# Altium PCB Wenzel_REF.PCBDOC (part 6 of 7)
Units mm, origin at the board's own origin, x right, y up, seen from the top; angles counter-clockwise.
Board outline 222.63 x 100.1 mm, 4 copper layers (Top, L2, L3, Bot), stack 1.6 mm thick; 406 components, 236 nets, 1324 pads, 1362 vias.
Unrouted connection lines stored in the file: 1.
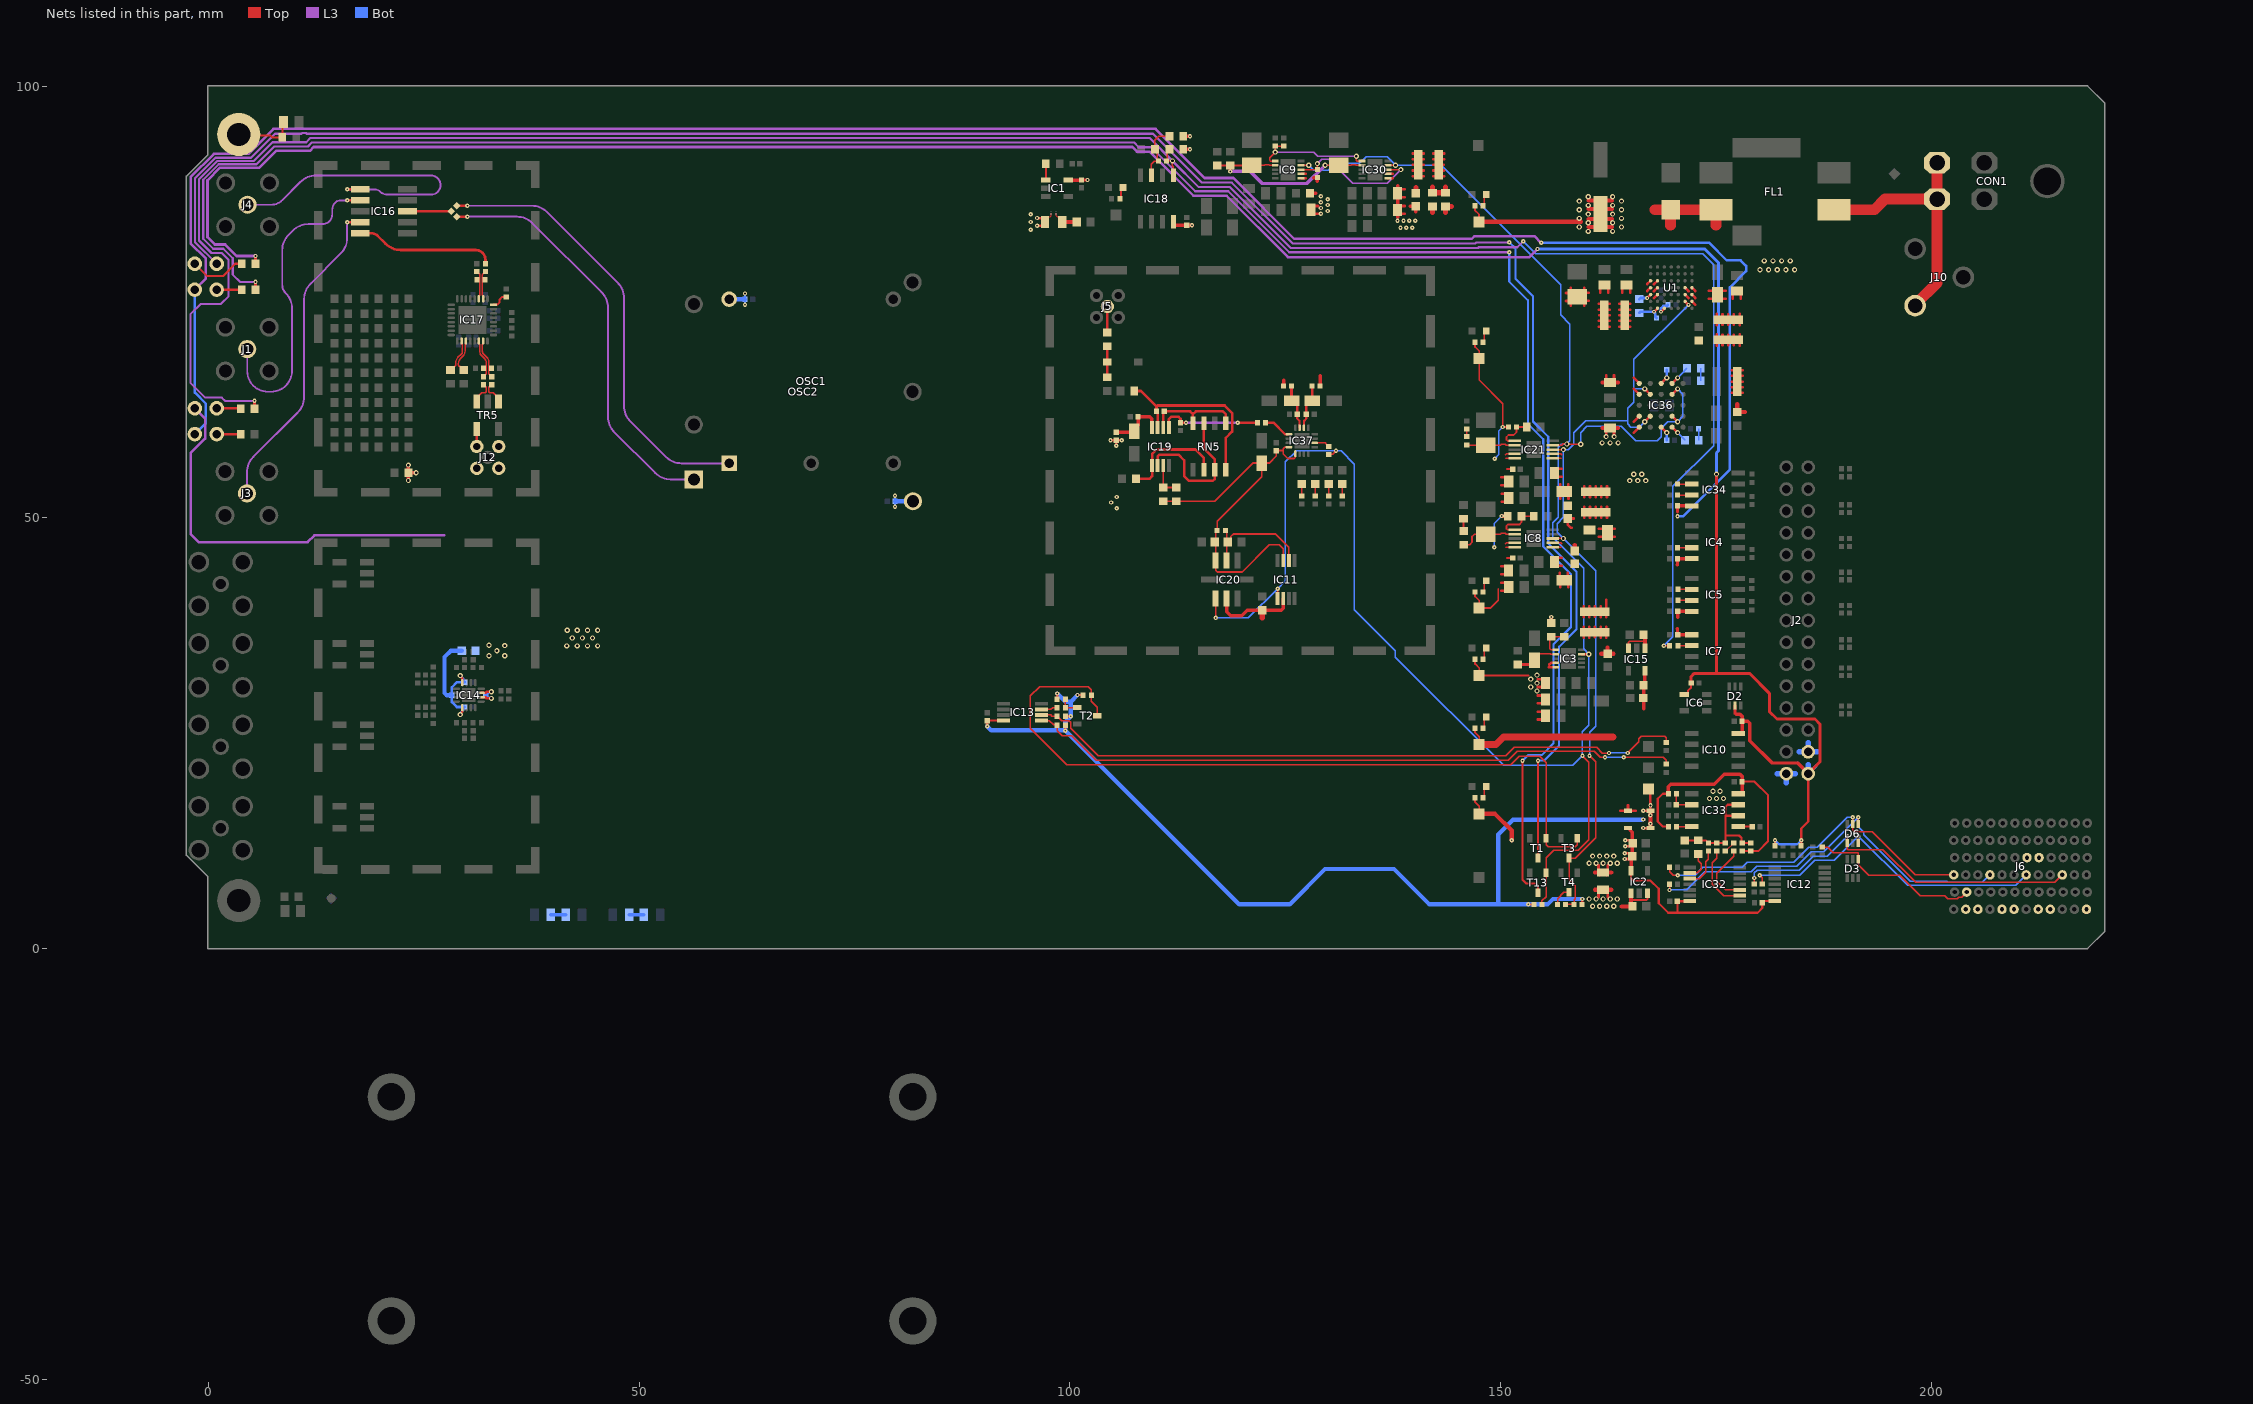
[diagram p6: the nets of this part, all layers, seen from the top]

## Via types
v1: diameter 0.5, hole 0.2, Top to Bot, tented both sides, 654 vias
v2: diameter 0.6, hole 0.3, Top to Bot, 478 vias
v3: diameter 0.5, hole 0.2, Top to Bot, 196 vias
v4: diameter 0.45, hole 0.2, Top to Bot, 34 vias

## Nets (pads, with @x,y where several pads share a name; then routed paths per layer and width w, separated by ;. In a path a pad name is that pad's centre, name@x,y a point inside that pad or via, vN(x,y) a via of type N, cw(c..) or ccw(c..) an arc to the next point about the centre after c; other vN are vias at no path point) (continued)
NetC26_1: C26.1 C27.2 IC8.1 IC8.2 L8.2 | length 6.3
  Top w0.2: IC8.1@156.001,46.527 157.001,46.527 ; IC8.2@156.001,47.027 156.961,47.027 157.071,46.917
  Top w0.3: C27.2@156.133,44.355 157.032,44.355 ; C27.2@156.133,45.275 157.032,45.275 ; C26.1@156.844,43.194 156.844,43.559 ; 156.886,41.875 C26.1@156.886,42.71 ; C26.1@157.775,42.728 157.775,43.563 ; 157.817,41.879 C26.1@157.817,42.244
NetC32_1: C32.1 IC8.7 R40.1 | length 6.9
  Top w0.2: R40.1@145.666,46.807 146.368,46.807 146.649,47.089 146.649,47.748 146.928,48.027 C32.1@148.25,48.027 149.953,48.027 150.052,48.126 150.52,48.126 150.62,48.027 IC8.7@151.601,48.027
NetC35_2: C35.2 R170.1 | length 1.4
  Top w0.15: R170.1@126.897,52.451 C35.2@126.897,53.846
NetC39_2: C39.2 C43.2 C45.2 IC14.8 IC14.13 L9.2 | length 16.4
  Top w0.3: v2@29.254,26.985 v2@29.254,27.066 ; v2@29.254,27.172 29.486,27.403 IC14.13@29.486,27.906 ; v2(29.254,31.621) 29.254,31.54 29.486,31.309 IC14.8@29.486,30.806
  Bot w0.3: v2@29.22,27.206 29.591,27.578 29.591,27.811 C43.2@29.751,27.971 28.855,27.971 28.273,28.553 C39.2@28.273,29.356 28.273,30.268 28.861,30.856 C45.2@29.786,30.856 29.626,31.016 29.626,31.25 v2(29.254,31.621)
  Bot w0.5: C39.2@28.273,29.356 27.676,29.356 27.435,29.597 27.435,33.775 28.165,34.505 L9.2@29.436,34.505
  other v2: 29.254,27.091
NetC40_2: C40.2 C48.2 NT2.2 OSC1.5 OSC2.2 R71.2 | length 9.6
  Top w0.127: R71.2@97.1,84.256 97.1,84.435 97.512,84.847 97.691,84.847 97.8,84.956 NT2.2@97.8,85.206
  Top w0.3: v3@96.187,83.811 R71.2@97.067,83.811 ; v3@96.187,84.7 R71.2@97.067,84.7
  Bot w0.254: v1(62.301,74.649) C40.2@62.3,75.3 v1@62.3,75.951 ; v1(79.701,51.199) C48.2@79.7,51.85 v1(79.699,52.501)
  Bot w0.5: OSC1.5@60.45,75.3 C40.2@62.3,75.3 ; C48.2@79.7,51.85 OSC2.2@81.775,51.85
  other v1: 62.299,75.951
  other v3: 95.458,83.364 96.184,83.808 95.455,84.256 96.184,84.703 95.455,85.15
NetC41_1: C41.1 OSC2.1 | length 48.3
  Top w0.3: C41.1@28.849,84.864 v1(30.083,84.864)
  L3 w0.226: v1(30.083,84.864) 35.834,84.864 cw(c35.834,82.324) 37.63,84.12 45.656,76.094 cw(c43.86,74.298) 46.4,74.298 46.4,61.652 ccw(c48.94,61.652) 47.144,59.856 51.866,55.134 ccw(c53.662,56.93) 53.662,54.39 OSC2.1@56.35,54.39
NetC41_2: C41.2 C46.2 IC16.3 | length 5.1
  Top w0.3: IC16.3@23.13,85.5 C46.2@28.212,85.5
NetC42_2: C42.2 IC14.2 IC14.3 | length 4.1
  Top w0.3: IC14.2@31.686,29.106 32.188,29.106 32.318,28.976 v2(32.863,28.976) ; IC14.3@31.686,29.606 32.188,29.606 32.318,29.736 v2(32.863,29.736)
  Bot w0.3: v2(32.863,28.976) 32.806,29.034 32.531,29.034 C42.2@32.209,29.356 32.531,29.678 32.806,29.678 v2(32.863,29.736)
NetC46_1: C46.1 OSC1.1 | length 52.1
  Top w0.3: C46.1@28.849,86.136 v1(30.083,86.136)
  L3 w0.226: v1(30.083,86.136) 37.535,86.136 cw(c37.535,83.596) 39.331,85.392 47.506,77.218 cw(c45.71,75.422) 48.25,75.422 48.25,62.92 ccw(c50.79,62.92) 48.994,61.124 53.124,56.994 ccw(c54.92,58.79) 54.92,56.25 OSC1.1@60.45,56.25
NetC47_1: C47.1 IC16.10 | length 16.3
  Top w0.3: IC16.10@17.67,82.96 18.888,82.96 cw(c18.888,82.923) 18.914,82.949 cw(c18.914,81.865) 19.681,82.632 20.569,81.744 ccw(c22.365,83.54) 22.365,81 31.03,81 cw(c31.03,79.85) 32.18,79.85 C47.1@32.18,79.407
NetC60_1: C60.1 C105.2 L3.2 U1.A4 U1.A5 U1.A6 U1.B4 U1.B5 | length 14.7
  Top w0.3: U1.B5@171.366,75.832 171.766,75.432 ; U1.B4@171.366,76.632 171.766,76.232 ; U1.A6@172.166,75.032 172.566,74.632 ; U1.A5@172.166,75.832 172.566,75.432 ; U1.A4@172.166,76.632 172.566,76.232 ; 174.134,75.34 C60.1@175.106,75.34 ; 174.134,76.265 C60.1@175.111,76.265 ; 175.053,72.293 L3.2@175.053,72.918 ; L3.2@175.053,72.947 175.053,73.571 ; C60.1@175.129,76.265 176.106,76.265 ; C60.1@175.135,75.34 176.106,75.34 ; 175.712,72.307 L3.2@175.712,72.918 ; L3.2@175.712,72.947 175.712,73.558 ; 176.37,72.321 L3.2@176.37,72.932 176.37,73.544 ; 176.907,75.349 176.91,75.352 C105.2@176.91,76.25 ; 177.029,72.307 L3.2@177.029,72.918 ; L3.2@177.029,72.947 177.029,73.558 ; 177.687,72.293 L3.2@177.687,72.918 ; L3.2@177.687,72.947 177.687,73.571 ; C105.2@177.83,76.25 177.83,75.352 177.833,75.349
NetC63_1: C63.1 IC19.6 RN5.1 RN5.4 | length 11.6
  Top w0.3: IC19.6@110.825,60.396 110.825,62.173 C63.1@110.941,62.289 113.922,62.289 114.262,61.949 ; RN5.4@114.262,60.899 114.262,61.949 ; RN5.1@118.072,60.899 118.072,61.949 117.732,62.289 114.602,62.289 114.262,61.949
NetC63_2: C63.2 IC19.7 R2.1 RN5.8 | length 21.9
  Top w0.3: R2.1@107.465,64.641 108.228,64.641 110.041,62.827 ; IC19.7@110.175,60.396 110.175,62.156 C63.2@110.041,62.289 110.041,62.827 ; RN5.8@118.072,55.499 118.072,59.193 118.822,59.943 118.822,62.076 117.942,62.957 110.17,62.957 110.041,62.827
NetC64_2: C64.2 R165.1 | length 1.4
  Top w0.15: R165.1@131.575,52.451 C64.2@131.575,53.846
NetC65_2: C65.2 C77.1 L4.2 L6.1 L8.1 | length 12.6
  Top w0.3: 158.191,48.784 158.097,48.784 157.733,49.148 L6.1@157.733,49.845 158.429,49.845 ; 159.677,49.94 L4.2@159.677,50.564 ; L4.2@159.677,50.593 159.677,51.217 ; 160.335,49.953 L4.2@160.335,50.564 ; L4.2@160.335,50.593 160.335,51.204 ; 160.994,49.967 L4.2@160.994,50.578 160.994,51.19 ; 161.375,47.726 162.347,47.726 C77.1@162.379,47.758 ; 161.375,48.651 162.352,48.651 C77.1@162.379,48.678 ; 161.652,49.953 L4.2@161.652,50.564 ; L4.2@161.652,50.593 161.652,51.204 ; 162.311,49.94 L4.2@162.311,50.564 ; L4.2@162.311,50.593 162.311,51.217 ; C77.1@162.371,48.651 163.192,48.651 ; C77.1@162.376,47.726 163.226,47.726
  Top w0.5: L8.1@158.579,46.081 158.579,46.777
NetC66_2: C66.2 R64.1 | length 1.4
  Top w0.15: R64.1@128.456,52.446 C66.2@128.456,53.846
NetC67_1: C67.1 IC19.5 R136.2 | length 11.9
  Top w0.254: v1(119.462,60.96) R136.2@121.773,60.96
  Top w0.3: IC19.5@111.475,60.396 111.48,60.401 111.48,61.378 111.746,61.644 112.594,61.644 112.818,61.42 C67.1@112.818,60.96 v1(113.47,60.96)
  L3 w0.3: v1(113.47,60.96) v1(119.462,60.96)
NetC68_2: C68.2 R163.1 | length 1.4
  Top w0.15: R163.1@130.015,52.446 C68.2@130.015,53.846
NetC71_2: C71.2 C138.1 C167.2 IC11.7 IC20.7 IC37.4 IC37.5 R159.2 R160.2 R179.2 | length 45.5
  Top w0.2: R159.2@110.842,51.846 R160.2@112.342,51.846 116.78,51.846 121.209,56.274 C138.1@122.252,56.274 ; R179.2@116.987,48.572 116.91,48.495 IC20.7@116.91,44.955 116.91,43.842 117.121,43.632 119.958,43.632 123.141,46.815 124.285,46.815 124.742,46.358 IC11.7@124.742,44.952 ; R179.2@117.084,48.455 117.084,49.534 122.252,54.703 C138.1@122.252,56.274 ; C71.2@123.936,57.724 123.936,57.102 123.109,56.274 C138.1@122.252,56.274 ; C71.2@124.075,57.746 124.094,57.727 124.723,57.727 ; IC37.4@125.396,58.121 125.39,58.114 124.917,58.114 124.745,57.943 124.745,57.332 125.271,56.806 126.02,56.806 126.137,56.924 126.137,57.361 IC37.5@126.146,57.371
NetC72_2: C72.2 L10.1 R8.2 U1.F3 U1.F4 U1.F5 U1.G3 U1.G4 U1.G5 | length 12.3
  Top w0.3: 163.731,72.115 L10.1@164.356,72.115 ; 163.731,74.749 L10.1@164.356,74.749 ; 163.744,72.774 L10.1@164.356,72.774 ; 163.744,74.091 L10.1@164.356,74.091 ; 163.759,73.432 L10.1@164.37,73.432 164.981,73.432 ; 164.097,76.052 C72.2@164.097,76.95 ; L10.1@164.385,72.115 165.009,72.115 ; L10.1@164.385,72.774 164.996,72.774 ; L10.1@164.385,74.091 164.996,74.091 ; L10.1@164.385,74.749 165.009,74.749 ; 165.017,76.052 C72.2@165.017,76.95 ; v4(166.966,75.432) U1.G5@167.366,75.832 ; 166.966,76.232 U1.G4@167.366,76.632 ; 166.966,77.032 U1.G3@167.366,77.432 ; 167.766,75.432 U1.F5@168.166,75.832 ; 167.766,76.232 U1.F4@168.166,76.632 ; 167.766,77.032 U1.F3@168.166,77.432
  Bot w0.3: R8.2@166.066,75.305 166.193,75.432 v4(166.966,75.432)
NetC76_2: C76.2 IC36.A3 | length 1.8
  Top w0.3: IC36.A3@168.597,65.523 v2(169.232,66.158)
  Bot w0.3: v2(169.232,66.158) C76.2@169.232,67.093
NetC79_2: C79.2 IC33.6 IC33.7 R58.1 R138.1 R139.1 R140.1 R141.1 R143.1 | length 15.8
  Top w0.254: C79.2@171.331,12.473 172.856,12.473 172.881,12.498 173.756,12.498 174.061,12.193 R139.1@174.081,12.193 R140.1@175.061,12.193 R141.1@176.042,12.193 176.042,13.073 ; IC33.6@177.532,15.365 176.148,15.365 176.042,15.259 ; IC33.7@177.532,16.635 176.308,16.635 176.042,16.369 176.042,15.259 ; R143.1@178.984,12.193 R58.1@178.003,12.193 177.931,12.265 177.931,12.773 177.631,13.073 176.042,13.073 ; 176.042,13.073 176.042,15.259
NetC81_2: C81.2 IC33.2 R146.2 | length 3.1
  Top w0.152: R146.2@170.376,17.905 170.356,17.885 C81.2@170.356,16.635 IC33.2@172.132,16.635
NetC82_2: C82.2 IC33.5 | length 1.8
  Top w0.254: IC33.5@177.391,14.095 C82.2@179.165,14.095
NetC85_1: C85.1 C92.2 IC21.1 IC21.2 L6.2 | length 6.3
  Top w0.2: IC21.1@156.001,56.847 157.001,56.847 ; IC21.2@156.001,57.347 156.961,57.347 157.071,57.238
  Top w0.3: C92.2@156.133,54.675 157.032,54.675 ; C92.2@156.133,55.595 157.032,55.595 ; C85.1@156.864,53.469 156.864,53.834 ; 156.906,52.15 C85.1@156.906,52.985 ; C85.1@157.795,53.003 157.795,53.838 ; 157.837,52.154 C85.1@157.837,52.519
NetC91_1: C91.1 IC21.7 R117.2 | length 5.7
  Top w0.2: R117.2@146.032,58.393 146.077,58.347 C91.1@148.25,58.347 149.953,58.347 150.052,58.447 150.52,58.447 150.62,58.347 IC21.7@151.601,58.347
NetC93_1: C93.1 C123.1 IC9.7 IC30.7 R51.2 R116.2 | length 24.3
  Top w0.2: R51.2@117.087,90.801 R116.2@118.608,90.801 121.083,90.801 C123.1@121.108,90.827 122.541,90.827 122.619,90.904 123.082,90.904 123.16,90.827 IC9.7@123.81,90.827 ; v2(129.594,90.834) 131.172,90.834 C93.1@131.179,90.827 132.612,90.827 132.69,90.904 133.153,90.904 133.231,90.827 IC30.7@133.881,90.827
  Top w0.4: v1@118.608,90.12 R116.2@118.608,90.801
  L3 w0.4: v1(118.608,90.112) 120.908,90.112 122.3,88.719 127.48,88.719 v2(129.594,90.834)
NetC94_2: C94.2 IC11.6 IC20.6 R179.1 | length 13.5
  Top w0.2: R179.1@117.927,48.572 117.927,48.552 118.18,48.298 IC20.6@118.18,44.955 ; C94.2@118.303,47.115 118.665,47.477 118.665,47.752 118.949,48.036 123.876,48.036 125.392,46.52 IC11.6@125.392,44.952
NetC95_1: C95.1 R129.2 ST1.1 | length 7
  Top w0.254: ST1.1@3.556,94.412 3.668,94.3 7.2,94.3 7.45,94.05 8.589,94.05 R129.2@8.614,94.075 8.614,95.739 C95.1@8.725,95.85
NetC101_1: C101.1 IC3.7 R39.1 | length 5.3
  Top w0.2: C101.1@153.886,33.502 153.886,33.627 154.411,34.152 155.721,34.152 155.775,34.097 IC3.7@156.36,34.097
  Top w0.3: R39.1@151.968,32.905 153.841,32.905 153.886,32.95 C101.1@153.886,33.377 C101.1@153.886,33.502
NetC154_2: C154.2 IC36.E3 | length 1.8
  Top w0.3: IC36.E3@168.597,60.443 v2(169.232,59.808)
  Bot w0.3: C154.2@169.232,58.943 v2(169.232,59.808)
NetD3_4: D3.4 J6.K2 R54.2 | length 20.3
  Top w0.152: R54.2@187.274,11.719 187.894,11.719 188.534,11.08 191.386,11.08 191.475,10.991 D3.4@191.475,10.317 191.475,9.667 192.696,8.445 196.291,8.445 198.648,6.088 201.502,6.088 201.843,5.747 202.951,5.747 203.127,5.924 203.462,5.924 J6.K2@204.039,6.5
NetD4_1: D4.1 R168.2 R169.1 | length 3.6
  Top w0.3: R168.2@104.34,66.241 D4.1@104.34,68 R169.1@104.34,69.841
NetD6_1: D6.1 J6.C3 R57.2 | length 42.2
  Top w0.15: R57.2@179.4,7.44 v1(179.4,8.144) ; D6.1@190.175,12.193 v3(190.176,12.981)
  Top w0.152: D6.1@190.175,12.193 190.175,11.531 190.277,11.43 194.312,11.43 198.115,7.627 214.266,7.627 J6.C3@215.139,8.5
  Bot w0.15: v1(179.4,8.144) 179.4,8.72 179.713,9.033 184.587,9.033 186.239,10.684 187.879,10.684 v3(190.176,12.981)
NetD6_3: D6.3 J6.F3 R52.2 | length 37.6
  Top w0.15: v1(180.02,8.459) 180.335,8.144 R52.2@180.335,7.44 ; D6.3@191.475,12.193 v3(191.476,12.981)
  Bot w0.15: v1(180.02,8.459) 184.653,8.459 186.4,10.205 188.7,10.205 v3(191.476,12.981)
  Bot w0.152: v3(191.476,12.981) 197.182,7.275 209.714,7.275 J6.F3@210.939,8.5
NetD6_4: D6.4 J6.I3 R53.2 | length 46.4
  Top w0.15: v1@169.561,6.76 R53.2@169.561,7.395 ; D6.4@191.475,14.393 v3(191.476,15.181)
  Bot w0.15: v1(169.561,6.747) 171.572,6.747 173.673,8.848 179.043,8.848 179.698,9.503 184.3,9.503 185.985,11.188 187.483,11.188 v3(191.476,15.181)
  Bot w0.152: v3(191.476,15.181) 191.476,14.069 192.122,13.423 192.122,13.127 197.497,7.752 201.714,7.752 201.851,7.615 205.853,7.615 J6.I3@206.739,8.5
NetD6_5: D6.5 J6.L3 R55.2 | length 40.1
  Top w0.15: R55.2@169.571,9.366 169.571,8.867 169.992,8.445 v1(170.511,8.445) ; D6.5@190.825,14.393 v3(190.826,15.181)
  Top w0.152: D6.5@190.825,14.393 190.825,13.715 191.045,13.496 193.081,13.496 198.077,8.5 J6.L3@202.539,8.5
  Bot w0.15: v1(170.511,8.445) 172.523,8.445 173.433,9.355 178.019,9.355 178.605,9.941 184.004,9.941 185.742,11.679 186.676,11.679 190.177,15.181 v3(190.826,15.181)
NetIC1_1: IC1.1 R3.2 | length 1.9
  Top w0.254: IC1.1@97.199,89.115 R3.2@97.199,90.99
NetIC3_6: IC3.6 R32.2 R33.1 | length 3.7
  Top w0.2: IC3.6@156.36,34.597 156.336,34.621 155.809,34.621 155.677,34.753 155.677,35.966 R33.1@155.833,36.123 R32.2@157.341,36.123
NetIC4_7: IC4.7 R13.2 | length 1.6
  Top w0.15: R13.2@170.509,46.458 IC4.7@172.132,46.458
NetIC5_6: IC5.6 R17.2 | length 1.6
  Top w0.15: R17.2@170.509,41.615 IC5.6@172.132,41.615
NetIC5_7: IC5.7 R15.2 | length 1.6
  Top w0.15: R15.2@170.509,40.345 IC5.7@172.132,40.345
NetIC7_2: IC7.2 R18.2 | length 1.7
  Top w0.15: R18.2@170.459,35.096 IC7.2@172.132,35.096
NetIC8_6: IC8.6 R42.2 R43.1 | length 5.4
  Top w0.2: IC8.6@151.601,48.527 150.787,48.527 150.637,48.676 150.637,48.976 150.804,49.143 152.13,49.143 152.387,49.399 R43.1@152.387,50.122 R42.2@153.81,50.122
NetIC9_3: IC9.3 IC30.3 R49.2 | length 15.8
  Top w0.15: IC9.3@126.812,90.325 R49.2@128.713,90.325 v2(128.713,91.02) v2@128.713,91.034 ; IC30.3@136.885,90.327 137.563,90.327 137.565,90.325 138.398,90.325 v2(138.4,90.327)
  L3 w0.15: v2(128.713,91.02) 129.208,91.516 130.039,91.516 132.826,88.729 136.802,88.729 v2(138.4,90.327)
NetIC9_6: IC9.6 IC30.6 R47.2 R48.1 | length 14.3
  Top w0.15: IC9.6@123.81,91.327 123.264,91.327 123.16,91.431 123.16,91.695 v2(123.823,92.357) ; v2@123.823,92.344 v2(123.823,92.357) ; R47.2@124.785,93.053 R48.1@123.823,93.053 v2(123.823,92.357) ; v2(133.231,91.887) 133.231,91.431 133.335,91.327 IC30.6@133.881,91.327
  L3 w0.15: v2(123.823,92.357) 128.293,92.357 128.764,91.887 v2(133.231,91.887)
NetIC13_1: IC13.1 R124.1 R126.2 | length 76.1
  Top w0.15: IC13.1@96.7,26.399 97.617,26.399 98.089,25.927 98.442,25.927 R124.1@98.516,25.854 98.516,25.218 99.09,24.644 100.193,24.644 103.037,21.8 143.4,21.8 150.878,21.8 151.923,22.846 160.828,22.846 161.539,22.135 v3@162.087,22.135 ; v3@164.25,22.135 168.828,22.135 169.169,21.793 R126.2@169.169,21.343
  Bot w0.15: v3(162.085,22.136) v3(164.249,22.136)
NetIC13_2: IC13.2 R125.1 R128.2 | length 77.2
  Top w0.15: IC13.2@96.7,27.049 97.742,27.049 97.888,26.903 R125.1@98.516,26.903 98.516,26.883 98.731,26.668 98.751,26.668 99.039,26.38 99.875,26.38 100.06,26.194 100.06,25.533 103.272,22.321 143.4,22.321 150.556,22.321 151.556,23.321 161.092,23.321 161.775,22.638 v3@162.544,22.638 ; v3(164.705,22.641) 166.01,23.946 166.01,24.303 166.304,24.596 168.995,24.596 169.169,24.423 R128.2@169.169,23.881
  Bot w0.15: v3(162.543,22.64) 164.704,22.64 v3(164.705,22.641)
NetIC13_3: IC13.3 R127.1 | length 1.9
  Top w0.15: IC13.3@96.7,27.699 97.777,27.699 97.972,27.895 R127.1@98.516,27.895
NetIC17_32: IC17.32 R77.2 | length 2.1
  Top w0.226: IC17.32@33.112,74.64 33.126,74.654 33.55,74.654 33.812,74.916 33.812,75.257 34.082,75.526 R77.2@34.611,75.526
NetIC18_3: IC18.3 R81.2 R99.1 R113.1 | length 6.7
  Top w0.15: IC18.3@109.456,89.667 109.456,90.974 109.783,91.301 110.223,91.301 R113.1@110.256,91.334 110.132,91.458 110.132,92.406 R99.1@109.85,92.688 109.85,93.711 110.327,94.188 R81.2@111.541,94.188
NetIC19_1: IC19.1 R148.1 RN5.6 | length 12.6
  Top w0.3: R148.1@107.65,54.449 109.2,54.449 109.525,54.774 IC19.1@109.525,55.996 109.525,57.322 110.053,57.85 114.56,57.85 115.532,56.878 RN5.6@115.532,55.499
NetIC19_2: IC19.2 RN5.3 RN5.7 | length 17.2
  Top w0.3: IC19.2@110.175,55.996 110.175,57.046 110.395,57.266 112.575,57.266 113.236,56.605 113.236,54.768 113.793,54.211 116.564,54.211 116.802,54.449 RN5.7@116.802,55.499 116.802,56.674 115.532,57.944 RN5.3@115.532,60.899
NetIC19_3: IC19.3 R159.1 R160.1 | length 4.1
  Top w0.2: IC19.3@110.825,55.996 110.825,53.463 R159.1@110.842,53.446 R160.1@112.342,53.446
NetIC21_6: IC21.6 R100.1 R135.2 | length 4.5
  Top w0.2: IC21.6@151.601,58.847 150.787,58.847 150.637,58.997 150.637,59.297 150.877,59.537 151.48,59.537 151.801,59.858 R135.2@151.801,60.46 R100.1@153.001,60.46
NetIC33_4: IC33.4 R145.1 | length 1.7
  Top w0.172: R145.1@170.376,14.095 171.991,14.095 IC33.4@172.071,14.015
NetIC34_6: IC34.6 R10.2 | length 1.6
  Top w0.15: R10.2@170.509,53.841 IC34.6@172.132,53.841
NetIC34_7: IC34.7 R161.2 | length 1.6
  Top w0.15: R161.2@170.509,52.571 IC34.7@172.132,52.571
NetIC36_A4: IC36.A4 R20.2 | length 2.5
  Top w0.3: IC36.A4@169.867,65.523 v2(170.502,66.158)
  Bot w0.15: v2(170.502,66.158) 171.277,66.933 171.277,66.997 R20.2@171.577,67.297
NetIC36_E4: IC36.E4 R9.2 | length 2.1
  Top w0.3: IC36.E4@169.867,60.443 v2(170.502,59.808)
  Bot w0.15: v2(170.502,59.808) 171.018,59.293 171.047,59.293 171.347,58.993 R9.2@171.347,58.943
NetIC37_1: IC37.1 R136.1 | length 3.2
  Top w0.3: R136.1@122.713,60.96 123.619,60.96 124.958,59.621 IC37.1@125.396,59.621
NetIC37_10: IC37.10 R166.2 | length 1.8
  Top w0.15: IC37.10@128.396,58.621 129.59,58.621 129.78,58.431 129.78,58.411 129.995,58.196 R166.2@130.015,58.196
NetJ5_1: J5.1 R169.2 | length 3
  Top w0.3: R169.2@104.34,71.441 J5.1@104.34,74.445
NetL1_1: L1.1 L2.2 | length 8.3
  Top w0.3: 159.587,36.028 L2.2@159.587,36.653 ; L2.2@159.587,36.682 159.587,37.306 ; 160.245,36.042 L2.2@160.245,36.653 ; L2.2@160.245,36.682 160.245,37.293 ; 160.904,36.056 L2.2@160.904,36.667 160.904,37.278 ; 161.562,36.042 L2.2@161.562,36.653 ; L2.2@161.562,36.682 161.562,37.293 ; 162.221,36.028 L2.2@162.221,36.653 ; L2.2@162.221,36.682 162.221,37.306
  Top w0.5: 161.651,34.155 L1.1@162.376,34.155 ; 162.376,34.88 L1.1@162.376,34.155 ; 163.057,34.155 L1.1@162.376,34.155
NetL11_2: L11.2 NT1.2 R71.1 | length 3
  Top w0.127: NT1.2@98.4,85.206 98.4,84.956 98.509,84.847 98.689,84.847 99.1,84.435 R71.1@99.1,84.256
  Top w0.5: R71.1@99.1,84.256 L11.2@100.775,84.255
NetL17_1: L17.1 R72.2 R167.2 | length 7.8
  Top w0.3: 142.132,89.566 L17.1@142.757,89.566 ; 142.132,92.2 L17.1@142.757,92.2 ; 142.145,90.225 L17.1@142.757,90.225 ; 142.145,91.542 L17.1@142.757,91.542 ; 142.16,90.883 L17.1@142.771,90.883 143.382,90.883 ; L17.1@142.786,89.566 143.41,89.566 ; L17.1@142.786,90.225 143.397,90.225 ; L17.1@142.786,91.542 143.397,91.542 ; L17.1@142.786,92.2 143.41,92.2
  Top w0.6: R167.2@142.075,87.892 142.075,88.303 ; R167.2@142.316,87.651 142.728,87.651 ; 142.903,87.652 R72.2@143.315,87.652 ; R72.2@143.58,87.893 143.58,88.305
NetL17_2: L17.2 L18.1 | length 6.6
  Top w0.3: 139.762,89.566 L17.2@140.387,89.566 ; 139.762,92.2 L17.2@140.387,92.2 ; 139.775,90.225 L17.2@140.387,90.225 ; 139.775,91.542 L17.2@140.387,91.542 ; 139.79,90.883 L17.2@140.401,90.883 141.012,90.883 ; L17.2@140.416,89.566 141.04,89.566 ; L17.2@140.416,90.225 141.027,90.225 ; L17.2@140.416,91.542 141.027,91.542 ; L17.2@140.416,92.2 141.04,92.2
  Top w0.6: L18.1@140.149,87.842 140.149,88.254
NetLD1_2: LD1.2 R4.1 | length 1.4
  Top w0.2: R4.1@147.945,17.45 148.075,17.58 148.075,18.525 LD1.2@148.3,18.75
NetLD2_2: LD2.2 R5.1 | length 1.4
  Top w0.2: R5.1@147.945,70.282 148.075,70.412 148.075,71.357 LD2.2@148.3,71.582
NetLD3_2: LD3.2 R6.1 | length 1.4
  Top w0.2: R6.1@105.785,86.958 105.914,87.087 105.914,88.032 LD3.2@106.14,88.258
NetLD4_2: LD4.2 R7.1 | length 1.4
  Top w0.2: R7.1@147.945,41.327 148.075,41.457 148.075,42.402 LD4.2@148.3,42.627
NetLD5_1: LD5.1 R119.1 | length 2.9
  Top w0.254: LD5.1@0.989,76.399 R119.1@3.899,76.399
NetLD6_1: LD6.1 R92.1 | length 2.8
  Top w0.15: R92.1@3.731,62.64 R92.1@3.776,62.595
  Top w0.3: LD6.1@1.001,62.64 R92.1@3.731,62.64
NetLD7_1: LD7.1 T1.3 | length 248
  Top w0.254: T1.3@154.293,10.45 v3(154.293,21.754)
  L3 w0.254: LD7.1@0.994,79.399 -1.517,81.91 -1.517,89.338 0.856,91.711 4.979,91.711 7.765,94.497 10.848,94.497 10.93,94.579 11.348,94.579 11.43,94.497 109.629,94.497 115.309,88.816 118.785,88.816 125.857,81.745 143.4,81.745 147.004,81.745 147.145,81.886 v3(150.974,81.886)
  Bot w0.254: v3(150.974,81.886) 151.683,81.177 151.683,77.672 153.728,75.626 153.728,61.099 155.484,59.344 155.484,46.945 158.771,43.658 158.771,37.003 156.751,34.984 156.751,23.5 155.006,21.754 v3(154.293,21.754)
NetLD7_2: LD7.2 R121.2 | length 6.6
  Top w0.254: LD7.2@-1.546,79.399 -0.113,77.966 1.716,77.966 3.149,79.399 R121.2@3.899,79.399
NetLD8_2: LD8.2 R65.1 | length 1.4
  Top w0.2: R65.1@147.945,25.504 148.075,25.634 148.075,26.579 LD8.2@148.3,26.804
NetLD9_1: LD9.1 R118.1 | length 2.8
  Top w0.3: LD9.1@1.001,59.64 R118.1@3.776,59.64
NetLD10_2: LD10.2 R131.1 | length 1.4
  Top w0.2: R131.1@147.92,86.148 148.05,86.278 148.05,87.223 LD10.2@148.275,87.448
NetLD11_2: LD11.2 R1.1 | length 1.4
  Top w0.2: R1.1@147.945,33.504 148.075,33.634 148.075,34.579 LD11.2@148.3,34.804
NetR8_1: R8.1 R30.2 U1.F7 | length 3.2
  Top w0.3: v4(167.766,73.832) U1.F7@168.166,74.232
  Bot w0.3: R8.1@166.066,73.705 166.193,73.832 v4(167.766,73.832) 167.766,73.792 167.91,73.648 167.91,73.253 R30.2@168.05,73.113
NetR9_1: R9.1 R21.2 | length 1.3
  Bot w0.15: R9.1@172.947,58.943 R21.2@172.947,60.243
NetR11_2: R11.2 U1.E7 | length 1.9
  Top w0.3: v4(168.566,73.832) U1.E7@168.966,74.232
  Bot w0.3: v4(168.566,73.832) 168.566,74.228 168.85,74.512 169.245,74.512 R11.2@169.366,74.632
NetR19_2: R19.2 R127.2 T2.1 | length 2.4
  Top w0.15: R19.2@99.456,28.886 R127.2@99.456,27.895 99.474,27.912 T2.1@100.85,27.912
NetR20_1: R20.1 R26.2 | length 1.5
  Bot w0.15: R26.2@173.177,65.818 R20.1@173.177,67.297
NetR40_2: R40.2 R41.1 | length 1.4
  Top w0.2: R41.1@145.655,49.808 145.666,49.797 R40.2@145.666,48.407
NetR117_1: R117.1 R142.2 | length 0.9
  Top w0.2: R117.1@146.032,59.333 R142.2@146.032,60.231
NetR119_2: R119.2 T13.3 | length 257.5
  Top w0.254: v3(152.509,21.754) 152.509,7.926 152.921,7.515 154.023,7.515 154.293,7.245 T13.3@154.293,6.445
  Top w0.3: R119.2@5.501,76.4 v1@5.501,77.298
  L3 w0.254: v1(5.502,77.3) 3.7,77.3 2.856,78.144 2.856,80.044 1.761,81.138 0.58,81.138 -0.574,82.292 -0.574,89.152 1.223,90.949 5.62,90.949 7.683,93.012 11.587,93.012 12.041,93.466 107.446,93.466 107.986,92.926 109.418,92.926 114.533,87.811 118.369,87.811 125.44,80.739 143.4,80.739 v3@150.975,80.739
  Bot w0.254: v3@150.975,80.739 150.975,77.334 153.127,75.181 153.127,60.839 154.92,59.046 154.92,46.603 158.13,43.392 158.13,37.269 156.11,35.249 156.11,23.765 154.74,22.395 153.15,22.395 v3(152.509,21.754)
  other v3: 150.973,80.74
NetR122_2: R122.2 T1.1 T2.3 T3.1 | length 91.1
  Top w0.15: T2.3@103.15,26.962 103.15,27.949 102.47,28.629 R122.2@102.47,29.359 102.47,29.961 102.093,30.337 96.466,30.337 95.4,29.272 95.4,25.506 99.636,21.269 143.4,21.269 151.134,21.269 152.127,22.262 154.496,22.262 155.243,21.515 T1.1@155.243,12.75 155.243,11.976 155.465,11.755 158.621,11.755 158.86,11.993 T3.1@158.86,12.75
NetR137_1: R137.1 R141.2 | length 1.4
  Top w0.132: R141.2@176.042,11.253 176.266,11.477 176.287,11.477 177.002,12.193 R137.1@177.022,12.193
NetR144_2: R144.2 T4.3 | length 2.3
  Top w0.15: R144.2@156.573,5.061 156.573,5.719 157.319,6.464 T4.3@157.91,6.464
NetR154_2: R154.2 R155.1 | length 1.7
  Bot w0.4: R154.2@48.859,3.85 R155.1@50.55,3.85
NetR156_2: R156.2 R157.1 | length 1.7
  Bot w0.4: R157.1@39.775,3.85 R156.2@41.475,3.85
OCXO_BUSY: IC18.1 R18.1 R82.2 R92.2 R113.2 | length 274.2
  Top w0.15: R82.2@111.791,92.688 111.718,92.688 111.293,92.263 111.293,91.431 R113.2@111.196,91.334 v2@111.723,91.334 ; v2@111.885,91.173 v2@111.723,91.334 ; v2@111.905,91.334 v2(111.892,91.334) ; IC18.1@111.996,89.667 111.996,90.659 111.892,90.763 v2(111.892,91.334) ; v1@168.815,35.096 v1(168.909,35.096) R18.1@169.519,35.096 ; v2@111.723,91.334 v2(111.892,91.334)
  Top w0.3: R92.2@5.377,62.597 v1@5.377,63.495
  L3 w0.254: v1(5.379,63.496) 1.954,63.496 1.58,63.871 -0.322,63.871 -2.06,65.609 -2.06,73.54 -0.863,74.737 1.471,74.737 2.378,75.644 2.378,79.848 1.564,80.662 0.382,80.662 -1.05,82.095 -1.05,89.214 1.065,91.33 5.299,91.33 7.478,93.509 11.382,93.509 11.862,93.989 109.243,93.989 111.898,91.334 v2(111.892,91.334) 114.934,88.292 118.568,88.292 125.64,81.22 143.4,81.22 147.331,81.22 147.421,81.31 151.885,81.31 v3@152.59,82.015
  Bot w0.15: v3(152.589,82.016) 154.063,80.542 154.739,80.542 173.426,80.542 174.67,79.297 174.67,58.293 169.959,53.582 169.959,36.146 v1(168.909,35.096)
P3V3: C84.2 C86.2 C87.2 C89.2 C103.2 C104.2 D7.2 IC4.8 IC5.8 IC7.1 IC15.5 IC34.8 LD5.2 LD9.2 R65.2 TP12.1 | length 288.5
  Top w0.2: R65.2@147.005,25.504 147.005,24.974 147.475,24.504 TP12.1@147.475,23.63
  Top w0.3: 163.863,15.928 163.865,15.926 D7.2@164.496,15.926 ; 164.743,16.559 164.746,16.556 D7.2@164.746,15.926 ; D7.2@164.996,15.926 165.627,15.926 165.629,15.923 ; C104.2@166.492,28.678 C104.2@166.56,28.678 ; C104.2@166.492,29.354 C104.2@166.56,29.354 ; C103.2@166.542,30.178 C103.2@166.56,30.178 ; C103.2@166.542,30.854 C103.2@166.71,30.854
  Top w0.4: 166.56,27.766 166.56,28.678 166.56,29.354 166.56,30.178 C103.2@166.56,30.516 166.71,30.666 166.71,30.854 IC15.5@166.71,32.202 ; 170.481,44.498 170.489,44.506 C86.2@170.489,45.188 IC4.8@172.132,45.188 ; 170.482,37.056 170.49,37.048 170.49,36.366 C89.2@170.499,36.366 IC7.1@172.132,36.366 ; 170.489,50.644 C84.2@170.489,51.306 172.127,51.306 IC34.8@172.132,51.301 ; 170.491,38.385 170.499,38.393 C87.2@170.499,39.075 IC5.8@172.132,39.075
  Top w0.8: TP12.1@147.475,23.63 149.424,23.63 150.287,24.493 163.014,24.493
  L3 w0.3: LD5.2@-1.551,76.399 -0.262,77.687 -0.262,80.004 -2.02,81.762 -2.02,89.46 0.677,92.157 4.676,92.157 7.573,95.054 109.933,95.054 115.632,89.355 118.955,89.355 126.003,82.307 146.63,82.307 146.938,82.615 153.883,82.615 v3(154.671,81.827) v3@154.674,81.824
  Bot w0.3: LD5.2@-1.551,76.399 -1.539,76.387 -1.539,64.446 -0.255,63.162 -0.255,60.925 LD9.2@-1.539,59.64 ; v3(154.671,81.827) 174.181,81.827 176.201,79.807 177.795,79.807 178.461,79.14 178.461,78.562 176.554,76.655 176.554,59.94 176.552,59.939 176.552,55.508 171.164,50.12 v3@170.485,50.12
  other v3: 170.482,50.123
P3V3_CPCIS: C10.2 C13.2 C36.2 C78.2 C80.2 D1.2 IC2.5 IC12.14 IC32.14 IC33.8 R4.2 R58.2 R143.2 R145.2 R146.1 TP11.1 | length 70.8
  Top w0.2: R4.2@147.005,17.45 147.005,16.92 147.475,16.45 TP11.1@147.475,15.576
  Top w0.254: IC2.5@165.096,8.989 165.096,8.114 165.355,7.855 167.33,7.855 168.305,6.88 168.305,5.205 169.399,4.111 179.782,4.111 180.319,4.648 C78.2@180.319,5.283 ; R146.1@169.423,17.918 168.788,17.918 168.194,17.324 168.194,14.702 168.801,14.095 R145.2@169.436,14.095 ; 170.474,4.23 C36.2@170.474,5.445 ; C36.2@170.495,5.445 IC32.14@171.911,5.445 ; IC33.8@177.391,17.905 IC33.8@177.401,17.915 ; C80.2@177.976,19.314 179.425,19.314 181.006,17.733 181.006,12.418 179.841,11.253 R143.2@178.984,11.253 R58.2@178.003,11.253 ; C78.2@180.34,5.412 C78.2@180.362,5.433 ; C78.2@180.362,5.455 IC12.14@181.777,5.455
  Top w0.3: v3(164.363,10.335) 164.365,10.337 165.096,10.337 C10.2@165.264,10.337 ; v3(164.363,11.016) 164.365,11.014 165.246,11.014 C10.2@165.264,11.014 ; v3(164.413,11.835) 164.415,11.837 165.246,11.837 C13.2@165.314,11.837 ; v3(164.413,12.516) 164.415,12.514 165.246,12.514 C13.2@165.314,12.514
  Top w0.4: D1.2@164.746,13.926 164.946,13.926 164.996,13.876 164.996,13.676 165.246,13.426 165.246,12.514 165.246,11.837 165.246,11.014 C10.2@165.246,10.676 165.096,10.526 165.096,10.337 IC2.5@165.096,8.989 ; R146.1@169.436,17.905 169.436,18.73 169.724,19.018 174.749,19.018 175.92,20.189 177.741,20.189 177.976,19.955 C80.2@177.976,19.314 177.976,18.005 177.876,17.905 IC33.8@177.643,17.905
  Top w0.5: TP11.1@147.475,15.576 149.309,15.576 151.25,13.635 v3(151.25,12.516)
  other v2: 174.197,17.356 175.011,17.356 175.826,17.356 174.604,18.192 175.418,18.192
P3V3_MP: C33.2 C38.2 C88.2 D1.1 D2.5 D7.1 IC6.4 IC10.8 IC13.8 J2.30 R19.1 R56.1 R121.1 R122.1 R123.1 R124.2 R125.2 R152.2 R153.2 TP7.1 | length 430.8
  Top w0.254: v1@90.4,25.764 C33.2@90.4,26.399 IC13.8@92.3,26.399 ; R19.1@98.516,28.886 v1@98.516,29.522 ; v1@99.456,25.218 R124.2@99.456,25.854 ; R125.2@99.456,26.903 v1@100.091,26.903 ; v1@100.895,29.359 R122.1@101.53,29.359 ; v1@153.188,5.061 R123.1@153.824,5.061 ; R56.1@159.427,5.061 v1@159.427,5.696 ; IC6.4@171.268,29.431 171.518,29.431 171.691,29.604 171.691,29.854 172.059,30.222 172.059,30.74 C88.2@172.082,30.764 ; R153.2@181.802,11.874 v1@181.802,12.509 ; R152.2@184.835,11.874 v1@184.835,12.509 ; v1(184.835,12.522) 184.835,13.879 185.654,14.698 J2.30@185.654,20.238
  Top w0.3: R121.1@5.501,79.4 v1@5.501,80.298 ; v3(166.513,13.928) 166.515,13.925 D1.1@167.146,13.925 ; v3(166.513,15.928) 166.515,15.925 D7.1@167.146,15.925 ; TP7.1@167.14,18.48 167.346,18.274 v3(167.346,16.559) ; D7.1@167.346,15.926 v3@167.346,16.556 ; v3@167.393,16.559 v3@167.396,16.556
  Top w0.35: C88.2@172.082,30.764 172.082,30.888 172.071,30.899 172.071,31.512 172.439,31.88 175.015,31.88 ; v2(175.015,54.999) 175.015,31.88 ; J2.30@185.654,20.238 187.029,21.613 187.029,25.982 186.438,26.573 182.029,26.573 181.145,27.457 181.145,29.565 178.829,31.88 175.015,31.88
  Top w0.4: D2.5@177.16,28.15 177.16,27.271 177.3,27.13 177.741,27.13 177.976,26.896 C38.2@177.976,26.323 ; IC10.8@177.643,24.914 177.876,24.914 177.976,25.014 C38.2@177.976,26.323 ; J2.30@185.654,20.238 184.417,21.476 181.457,21.476 178.876,24.057 178.876,26.07 178.633,26.313 177.986,26.313 C38.2@177.976,26.323
  Top w0.5: D1.1@167.346,13.926 D7.1@167.346,15.926
  L3 w0.3: v1(5.503,80.3) 3.314,80.3 1.97,81.643 0.789,81.643 -0.07,82.501 -0.07,89.085 1.391,90.545 5.944,90.545 7.897,92.498 11.8,92.498 12.254,92.951 107.233,92.951 107.773,92.411 109.204,92.411 114.319,87.296 118.156,87.296 125.27,80.182 143.4,80.182 153.307,80.182 v3(154.238,81.112)
  Bot w0.254: v1(181.802,12.522) 182.271,12.053 184.366,12.053 v1(184.835,12.522)
  Bot w0.35: v3(154.238,81.112) 154.241,81.109 154.716,81.109 173.661,81.109 175.238,79.533 175.238,57.696 175.015,57.473 v2(175.015,54.999) ; 184.417,21.476 J2.30@185.654,20.238 186.528,21.112
  Bot w0.5: v1(90.387,25.751) 90.875,25.263 v1@99.443,25.263 ; v1(98.529,29.535) 99.469,28.594 100.104,28.594 ; v1(99.443,25.205) v1@99.443,25.263 ; v1(100.882,29.372) 100.104,28.594 ; v1(159.44,5.709) 156.043,5.709 155.408,5.074 v1(153.175,5.074) 149.691,5.074 ; v3(166.513,14.928) 166.388,14.928 166.351,14.891 151.391,14.891 149.691,13.191 149.691,5.074 ; v1@99.443,25.263 119.632,5.074 125.495,5.074 129.598,9.177 137.593,9.177 141.696,5.074 143.4,5.074 149.691,5.074 ; v1@99.443,25.263 99.443,26.229 v1(100.104,26.89) 100.104,28.594
  Bot w0.6: J2.30@185.654,20.238 185.654,21.282
  other v3: 167.343,14.428 167.343,15.428
P3V3A: C14.2 C16.2 C17.2 C53.2 C62.2 IC1.5 IC3.9 IC3.10 IC18.8 L9.1 L13.1 LD6.2 R1.2 R33.2 R81.1 R82.1 TP2.1 | length 70.2
  Top w0.2: R1.2@147.005,33.504 147.005,32.974 147.475,32.504 TP2.1@147.475,31.63 153.236,31.63
  Top w0.3: 154.255,26.521 C16.2@155.154,26.521 ; 154.255,27.402 C16.2@155.154,27.402 ; 154.255,28.39 C14.2@155.154,28.39 ; 154.255,29.31 C14.2@155.154,29.31 ; 154.255,30.299 C17.2@155.154,30.299 ; 154.255,31.219 C17.2@155.154,31.219 ; 155.534,32.597 IC3.10@156.36,32.597 ; 155.627,32.905 155.819,33.097 IC3.9@156.36,33.097
  Top w0.4: v2(23.233,54.253) L13.1@23.233,55.146 ; v2(23.233,56.039) L13.1@23.233,55.146 ; v2(24.126,55.146) L13.1@23.233,55.146 ; IC1.5@99.799,89.115 101.327,89.115 C53.2@101.334,89.122 v1@102.016,89.122 ; IC18.8@111.996,84.267 111.996,83.967 112.096,83.867 C62.2@113.55,83.867 ; R82.1@113.234,92.688 v1@113.916,92.688 ; R81.1@113.234,94.188 v1@113.916,94.188 ; C62.2@113.551,83.867 v1(114.161,83.866) ; R33.2@155.833,37.723 v1@155.833,38.404
  L3 w0.3: LD6.2@-1.539,62.64 -0.351,61.452 -0.351,59.133 -2.003,57.481 -2.003,48.009 -1.104,47.109 11.546,47.109 12.316,47.88 27.382,47.88
  other v1: 155.841,38.412 102.024,89.13 113.924,92.688 113.924,94.188
  other v2: 154.189,29.83 153.46,30.292 154.189,30.755 153.46,31.218 154.189,31.68 32.59,33.917 34.41,33.917 33.5,34.505 41.616,35.071 42.838,35.071 44.013,35.071 45.189,35.071 34.41,35.093 32.59,35.139 42.25,35.98 43.426,35.98 44.601,35.98 41.662,36.89 42.838,36.89 44.013,36.89 45.189,36.89
P3V6: C73.2 C100.2 IC15.1 IC15.3 IC36.D1 IC36.E1 L2.1 | length 15.7
  Top w0.2: IC15.3@164.81,34.802 164.81,35.488 164.927,35.605 166.71,35.605
  Top w0.3: 159.587,38.398 L2.1@159.587,39.023 ; L2.1@159.587,39.052 159.587,39.676 ; 160.245,38.412 L2.1@160.245,39.023 ; L2.1@160.245,39.052 160.245,39.663 ; 160.904,38.426 L2.1@160.904,39.037 160.904,39.648 ; 161.562,38.412 L2.1@161.562,39.023 ; L2.1@161.562,39.052 161.562,39.663 ; 162.221,38.398 L2.1@162.221,39.023 ; L2.1@162.221,39.052 162.221,40.434 ; v2@162.238,59.517 C73.2@162.238,59.908 ; v2@163.119,59.517 C73.2@163.119,59.908 ; 165.422,59.808 IC36.E1@166.057,60.443 ; 165.422,61.078 IC36.D1@166.057,61.713 ; C100.2@166.537,36.017 C100.2@166.71,36.017
  Top w0.5: 161.78,60.348 C73.2@162.679,60.348 163.577,60.348 ; C100.2@166.555,36.355 166.71,36.199 166.71,36.017 166.71,35.605 IC15.1@166.71,34.802
  other v2: 164.957,54.247 165.882,54.247 166.808,54.247 165.42,54.977 166.345,54.977 161.746,58.616 162.672,58.616 163.597,58.616 162.209,59.346 163.134,59.346
P5V4_DAC_VDD: C12.1 C142.2 IC37.15 L16.2 | length 5.4
  Top w0.25: C142.2@126.371,61.946 126.371,61.43 126.646,61.155 IC37.15@126.646,60.371
  Top w0.3: L16.2@125.705,65.221 C12.1@125.705,63.519 125.896,63.519 126.371,63.044 C142.2@126.371,61.946
P5V4_DAC_VLOGIC: C99.1 C143.2 IC37.14 R164.2 | length 5.4
  Top w0.25: IC37.14@127.146,60.371 127.146,61.155 127.422,61.43 C143.2@127.422,61.946
  Top w0.3: C143.2@127.422,61.946 127.422,63.044 127.897,63.519 C99.1@128.088,63.519 R164.2@128.088,65.221
P5V4A: C83.2 C90.2 C96.2 C149.2 IC11.2 IC20.2 IC21.9 IC21.10 L16.1 R5.2 R135.1 R164.1 TP8.1 | length 34.8
  Top w0.2: R5.2@147.005,70.282 147.005,69.753 147.475,69.283 TP8.1@147.475,68.408 147.475,65.917 150.213,63.179 v1(150.213,60.46) ; 150.531,57.238 150.641,57.347 IC21.9@151.601,57.347 ; 150.601,56.847 IC21.10@151.601,56.847
  Top w0.254: v1@150.226,60.46 R135.1@150.861,60.46 ; 150.725,55.594 C90.2@151.36,55.594
  Top w0.3: C149.2@121.979,39.202 C149.2@121.979,39.22 ; C149.2@122.655,39.202 C149.2@122.655,39.22 ; 150.071,53.693 C96.2@150.969,53.693 ; 150.071,54.613 C96.2@150.969,54.613 ; 150.076,51.796 C83.2@150.974,51.796 ; 150.076,52.716 C83.2@150.974,52.716
  Top w0.4: IC20.2@118.18,40.555 118.18,39.029 118.646,38.563 119.912,38.563 120.55,39.202 121.979,39.202 C149.2@122.317,39.202 122.655,39.202 124.508,39.202 124.742,39.436 IC11.2@124.742,40.552 ; L16.1@124.785,65.221 124.785,65.917 ; R164.1@129.028,65.221 129.028,66.424
  Top w0.6: 122.317,38.314 122.317,39.195 122.314,39.198 C149.2@122.317,39.202
  Bot w0.2: v1(149.273,56.794) 149.75,57.271 149.75,59.997 v1(150.213,60.46)
P5V5: C21.2 IC36.A1 IC36.B1 R167.1 | length 5.5
  Top w0.3: 142.063,85.374 R167.1@142.063,86.039 ; C21.2@162.238,66.058 162.238,66.449 ; C21.2@163.119,66.058 163.119,66.449 ; 165.422,64.888 IC36.B1@166.057,64.253 ; 165.422,66.158 IC36.A1@166.057,65.523
  Top w0.5: 161.78,65.618 C21.2@162.679,65.618 163.577,65.618
  Top w0.6: 142.075,85.374 R167.1@142.075,85.785
P5V5A: C1.2 C3.2 C23.2 C108.2 IC9.1 IC9.2 IC30.1 IC30.2 L18.2 R49.1 | length 12.1
  Top w0.3: IC9.1@126.81,89.327 127.373,89.327 ; IC9.2@126.81,89.827 127.373,89.827 ; C23.2@127.879,85.188 128.777,85.188 ; C23.2@127.879,86.108 128.777,86.108 ; IC30.1@136.881,89.327 137.443,89.327 ; IC30.2@136.881,89.827 137.443,89.827 ; C1.2@137.949,85.188 138.848,85.188 ; C1.2@137.949,86.108 138.848,86.108 ; C108.2@137.949,87.107 138.848,87.107 ; C108.2@137.949,88.027 138.017,88.027 138.848,88.027
  Top w0.4: C3.2@128.088,87.581 128.5,87.581 ; 128.301,89.385 R49.1@128.713,89.385 128.713,88.973 ; 138.017,84.77 C1.2@138.017,85.216 ; C1.2@138.017,85.915 138.017,86.108 138.017,86.554 ; 138.017,86.689 138.017,87.135 C108.2@138.017,87.328 ; C108.2@138.017,87.834 138.017,88.027 138.017,88.473 ; 139.471,86.101 L18.2@139.883,86.101 ; 140.124,85.424 L18.2@140.124,85.836
  other v3: 138.349,83.587 139.03,83.587 139.712,83.587 138.008,84.384 138.689,84.384 139.371,84.384 140.053,84.384 129.113,85.193 129.91,85.533 129.113,85.874 129.91,86.215 129.113,86.556 129.91,86.897 129.113,87.238
P10V5A: C28.2 C30.2 C31.2 IC8.9 IC8.10 L14.1 R7.2 R43.2 TP10.1 | length 18.9
  Top w0.2: R7.2@147.005,41.327 147.005,40.798 147.475,40.328 TP10.1@147.475,39.453 148.755,39.453 149.675,40.373 149.675,41.674 ; 150.531,46.917 150.641,47.027 IC8.9@151.601,47.027 ; 150.601,46.527 IC8.10@151.601,46.527
  Top w0.254: v1@104.708,58.935 L14.1@105.36,58.935 ; v1@105.36,58.284 L14.1@105.36,58.935 ; L14.1@105.361,58.935 v1(106.012,58.936) ; 150.718,45.265 C31.2@151.354,45.265
  Top w0.3: 150.064,43.364 C28.2@150.962,43.364 ; 150.064,44.284 C28.2@150.962,44.284 ; 150.069,41.467 C30.2@150.968,41.467 ; 150.069,42.387 C30.2@150.968,42.387
  Top w0.4: v1@150.105,50.122 R43.2@150.787,50.122
  Bot w0.2: v1(149.24,46.498) 149.24,49.273 v1(150.097,50.13)
  other v1: 105.423,51.042 104.771,51.693 105.422,52.346 105.361,58.283 104.708,58.934
P10V5A_CH: C69.1 C70.2 IC19.8 L14.2 | length 6.7
  Top w0.4: L14.2@105.36,59.855 107.359,59.855 C69.1@107.449,59.945 107.449,60.22 107.899,60.671 C70.2@107.899,61.645 109.256,61.645 109.503,61.398 109.503,60.417 IC19.8@109.525,60.396
P12V0: C7.2 C74.2 C98.1 D11.1 FL1.2 J2.28 J2.29 L3.1 L4.1 L12.1 R131.2 R149.1 TP1.1 | length 65.4
  Top w0.2: R131.2@146.98,86.148 146.98,85.619 147.45,85.149 TP1.1@147.45,84.274
  Top w0.254: R149.1@161.862,8.767 R149.1@161.868,8.761
  Top w0.3: 159.677,52.31 L4.1@159.677,52.934 ; L4.1@159.677,52.963 159.677,53.587 ; 160.335,52.323 L4.1@160.335,52.934 ; L4.1@160.335,52.963 160.335,53.574 ; 160.994,52.337 L4.1@160.994,52.948 160.994,53.588 ; R149.1@161.325,8.899 161.325,9.624 ; 161.652,52.323 L4.1@161.652,52.934 ; L4.1@161.652,52.963 161.652,53.574 ; 162.311,52.31 L4.1@162.311,52.934 ; L4.1@162.311,52.963 162.311,53.587 ; R149.1@162.4,8.899 162.4,9.624 ; 175.053,69.923 L3.1@175.053,70.548 ; L3.1@175.053,70.577 175.053,71.201 ; 175.712,69.937 L3.1@175.712,70.548 ; L3.1@175.712,70.577 175.712,71.188 ; 176.37,69.951 L3.1@176.37,70.562 176.37,71.174 ; 176.781,64.416 L12.1@177.406,64.416 ; 176.781,67.05 L12.1@177.406,67.05 ; 176.794,65.075 L12.1@177.406,65.075 ; 176.794,66.392 L12.1@177.406,66.392 ; 176.809,65.733 L12.1@177.42,65.733 178.031,65.733 ; 177.029,69.937 L3.1@177.029,70.548 ; L3.1@177.029,70.577 177.029,71.188 ; L12.1@177.435,64.416 178.059,64.416 ; L12.1@177.435,65.075 178.046,65.075 ; L12.1@177.435,66.392 178.046,66.392 ; L12.1@177.435,67.05 178.059,67.05 ; 177.687,69.923 L3.1@177.687,70.548 ; L3.1@177.687,70.577 177.687,71.201
  Top w0.5: TP1.1@147.45,84.274 159.301,84.274 ; 160.199,83.667 C98.1@161.384,83.667 ; 160.199,84.598 C98.1@161.363,84.598 ; 160.199,85.756 C98.1@161.413,85.756 ; 160.199,86.751 C98.1@161.413,86.751 ; 160.912,8.767 R149.1@161.862,8.767 162.812,8.767 ; R149.1@161.461,8.55 161.461,8.756 R149.1@161.962,8.756 ; C98.1@161.668,85.756 162.881,85.756 ; C98.1@161.668,86.751 162.881,86.751 ; C98.1@161.696,83.667 162.881,83.667 ; C98.1@161.717,84.598 162.881,84.598 ; R149.1@161.868,8.761 162.288,8.761 R149.1@162.288,8.555 ; 177.42,63.102 C74.2@177.42,62.203 178.319,62.203
  Top w1.27: 167.893,85.672 D11.1@169.693,85.672 ; 169.693,83.872 D11.1@169.693,85.672 ; 174.942,83.872 FL1.2@174.942,85.672 D11.1@169.693,85.672
  Bot w0.6: 182.071,20.238 J2.29@183.114,20.238 ; 183.114,19.195 J2.29@183.114,20.238 ; 184.158,20.238 J2.29@183.114,20.238 ; 184.61,22.778 J2.28@185.654,22.778 ; 185.654,23.822 J2.28@185.654,22.778 186.698,22.778
  other v2: 160.234,9.837 161.048,9.837 161.862,9.837 162.677,9.837 163.491,9.837 160.641,10.674 161.455,10.674 162.27,10.674 163.084,10.674 180.061,78.707 181.064,78.707 182.068,78.707 183.071,78.707 184.075,78.707 180.562,79.741 181.566,79.741 182.569,79.741 183.573,79.741 160.126,83.164 162.954,83.164 159.092,83.666 163.988,83.666 160.126,84.168 162.954,84.168 159.092,84.67 163.988,84.67 160.126,85.171 162.954,85.171 159.092,85.673 163.988,85.673 160.126,86.175 162.954,86.175 159.092,86.677 163.988,86.677 160.126,87.178 162.954,87.178
P12V0_CPCIS: C8.2 IC2.1 IC2.3 J6.A1 J6.D1 J6.E1 J6.G1 J6.H1 J6.J1 J6.K1 R149.2 | length 9
  Top w0.2: 165.096,5.586 166.879,5.586 166.996,5.703 IC2.3@166.996,6.389
  Top w0.3: 161.325,5.909 R149.2@161.325,6.634 ; 162.4,5.909 R149.2@162.4,6.634 ; C8.2@165.096,5.174 C8.2@165.27,5.174
  Top w0.5: 160.912,6.767 R149.2@161.862,6.767 162.812,6.767 ; 164.037,4.836 C8.2@165.252,4.836 165.096,4.992 165.096,5.174 165.096,5.586 IC2.1@165.096,6.389
  Top w1: J6.A1@217.92,4.481 J6.A1@217.939,4.5
  other v2: 160.641,4.86 161.455,4.86 162.27,4.86 163.084,4.86 160.234,5.696 161.048,5.696 161.862,5.696 162.677,5.696 163.491,5.696
P12V0F: CON1.3 CON1.4 FL1.1 J10.3 | length 29.9
  Top w1.27: FL1.1@188.642,85.672 193.324,85.672 194.552,86.9 CON1.4@200.6,86.9 ; J10.3@198.108,74.7 200.6,77.193 CON1.4@200.6,86.9 ; CON1.3@200.6,91.1 CON1.4@200.6,86.9
P13V0: C124.1 C125.2 L10.2 R72.1 | length 16.9
  Top w0.3: 143.568,85.375 R72.1@143.568,86.04 ; 157.546,75.088 C124.1@158.084,75.088 ; 157.546,76.013 C124.1@158.523,76.013 ; 158.084,74.547 C124.1@158.084,75.088 ; C124.1@158.084,75.447 C124.1@158.084,75.088 ; C124.1@158.084,75.719 158.084,76.619 ; C124.1@158.517,75.088 C124.1@158.084,75.088 ; C124.1@159.223,76.033 160.2,76.033 ; C124.1@159.228,75.108 160.2,75.108 ; 159.656,74.547 C124.1@159.656,75.447 ; C124.1@159.656,75.719 159.656,76.619 ; 161.361,72.115 L10.2@161.986,72.115 ; 161.361,74.749 L10.2@161.986,74.749 ; 161.374,72.774 L10.2@161.986,72.774 ; 161.374,74.091 L10.2@161.986,74.091 ; 161.389,73.432 L10.2@162,73.432 162.611,73.432 ; 161.54,76.052 C125.2@161.54,76.95 ; L10.2@162.015,72.115 162.639,72.115 ; L10.2@162.015,72.774 162.626,72.774 ; L10.2@162.015,74.091 162.626,74.091 ; L10.2@162.015,74.749 162.639,74.749 ; 162.46,76.052 C125.2@162.46,76.95
  Top w0.6: 143.58,85.375 R72.1@143.58,85.787 ; R72.1@143.821,86.052 144.233,86.052
PE_CLK.CLK_N: J6.F4
PE_CLK.CLK_P: J6.E4
PGOOD: IC3.4 IC9.4 IC11.1 IC20.1 IC21.4 IC30.4 IC36.B4 IC36.D4 R123.2 R166.1 T13.1 | length 232.3
  Top w0.15: v1(116.91,38.314) IC20.1@116.91,40.555 ; IC11.1@124.092,40.552 v1(124.092,41.702) v1@124.092,41.729 ; IC9.4@126.81,90.827 v2@127.688,90.827 ; R166.1@130.015,57.256 130.066,57.307 130.462,57.307 v1(130.858,57.703) ; IC30.4@136.881,90.827 v2@137.759,90.827 ; R123.2@154.764,5.061 154.766,5.064 154.766,5.508 155.243,5.986 T13.1@155.243,8.745 155.243,10.47 156.126,11.352 158.96,11.352 160.196,12.588 160.196,21.584 v3(159.461,22.32) ; IC21.4@156.001,58.347 157.04,58.347 157.213,58.52 157.62,58.52 v2(157.65,58.49) 157.654,58.486 159.226,58.486 v2(159.256,58.456)
  Top w0.3: v2@127.688,90.827 v2@127.702,90.84 ; v2@137.759,90.827 v2@137.772,90.84 ; IC3.4@159.36,34.097 v2@160.185,34.097 ; IC36.D4@169.867,61.713 v2(170.502,61.078) ; IC36.B4@169.867,64.253 v2(170.502,64.888)
  Bot w0.15: v1(116.91,38.314) 120.705,38.314 v1(124.092,41.702) 125,42.61 125,56.403 126.306,57.709 130.852,57.709 v1(130.858,57.703) 131.449,57.703 133,56.152 133,39.265 137.75,34.515 137.75,33.75 150.302,21.198 158.338,21.198 v3(159.461,22.32) 159.461,25.122 160.197,25.859 v2(160.197,34.097) 159.587,34.708 159.587,44.097 156.028,47.655 156.028,49.367 156.647,49.985 156.647,58.132 157.005,58.49 v2(157.65,58.49) 158.006,58.847 158.006,72.401 156.917,73.49 156.917,76.996 143.085,90.829 137.774,90.829 v2(137.772,90.827) 136.782,91.817 134.345,91.817 133.575,91.046 130.742,91.046 129.959,90.263 128.265,90.263 v2(127.702,90.827) ; v2(159.256,58.456) 159.256,59.795 159.986,60.525 163.985,60.525 165.644,58.866 168.151,58.866 168.61,59.326 168.61,60.326 169.362,61.078 v2(170.502,61.078) 171.114,61.69 171.114,64.276 v2(170.502,64.888)
PSU_EN: IC8.3 IC21.3 IC36.B2 IC36.D2 R56.2 R144.1 T3.3 U1.B6 | length 93.4
  Top w0.15: IC8.3@156.001,47.527 v2(157.25,47.527) ; IC21.3@156.001,57.847 v2(157.25,57.847) ; R144.1@157.513,5.061 R56.2@158.487,5.061 158.487,5.596 158.631,5.74 158.631,7.228 157.91,7.949 T3.3@157.91,10.45 158.623,10.45 160.974,12.801 160.974,21.644 v3(160.286,22.333)
  Top w0.3: v2(166.692,61.078) IC36.D2@167.327,61.713 ; v2(166.692,64.888) IC36.B2@167.327,64.253 ; U1.B6@171.366,75.032 v4(171.766,74.632)
  Bot w0.15: v3(160.286,22.333) 160.286,25.054 160.975,25.744 160.975,43.801 v2(157.25,47.527) 156.52,48.257 156.52,49.258 157.25,49.988 v2(157.25,57.847) 157.833,57.847 158.472,58.486 158.472,59.804 159.855,61.187 164.731,61.187 ; v2(166.692,61.078) 166.074,60.46 165.09,60.46 164.731,60.82 164.731,61.187 ; v2(166.692,64.888) 165.455,64.888 165.436,64.906 ; v4(171.766,74.632) 165.436,68.303 165.436,64.906 ; 164.731,61.187 164.731,62.641 165.436,63.346 165.436,64.906
PWR_GA0: IC32.3 R137.2 | length 7.4
  Top w0.152: R137.2@177.022,11.253 177.022,10.632 175.575,9.184 175.053,8.662 175.053,7.767 176.074,6.745 IC32.3@177.732,6.745
PWR_GA1: IC32.2 R140.2 | length 7.8
  Top w0.152: R140.2@175.061,11.253 175.061,10.431 174.535,9.905 174.535,7.429 175.869,6.095 IC32.2@177.732,6.095
PWR_GA2: IC32.10 R139.2 | length 4.7
  Top w0.152: IC32.10@171.932,8.045 173.022,8.045 173.773,8.796 173.773,10.018 174.082,10.327 R139.2@174.082,11.254
  Top w0.254: R139.2@174.081,11.253 R139.2@174.082,11.254
PWR_GA3: IC32.9 R138.2 | length 3.4
  Top w0.152: IC32.9@171.932,8.705 171.946,8.719 172.796,8.719 173.224,9.146 173.224,9.772 172.881,10.116 R138.2@172.881,10.898
RF_100M_OUT0: IC16.6 J4.1 | length 37.4
  Top w0.3: v1(16.133,88.04) IC16.6@17.67,88.04
  L3 w0.226: J4.1@4.58,86.25 7.318,86.25 ccw(c7.318,88.062) 8.599,86.781 10.719,88.901 cw(c12.515,87.105) 12.515,89.645 25.866,89.645 cw(c25.866,88.56) 26.95,88.56 26.95,88.502 cw(c25.862,88.502) 25.862,87.414 20.81,87.414 cw(c20.81,88.56) 20,87.75 ccw(c19.3,87.05) 19.3,88.04 v1(16.133,88.04)
RF_100M_OUT1: IC16.7 J1.1 | length 37.3
  Top w0.3: v1(16.133,86.759) IC16.7@17.67,86.759
  L3 w0.226: J1.1@4.54,69.5 4.54,66.949 ccw(c6.943,66.949) 5.244,65.25 ccw(c6.92,66.926) 6.92,64.556 7.33,64.556 ccw(c7.33,66.926) 9.006,65.25 ccw(c7.21,67.046) 9.75,67.046 9.75,74.198 ccw(c7.21,74.198) 9.006,75.994 cw(c9.988,76.976) 8.599,76.976 8.599,80.971 cw(c11.139,80.971) 9.343,82.767 9.832,83.256 cw(c11.628,81.46) 11.628,84 13.269,84 ccw(c13.269,85.132) 14.4,85.132 14.4,85.655 cw(c15.595,85.655) 14.75,86.5 cw(c15.376,85.874) 15.376,86.759 v1(16.133,86.759)
RF_100M_OUT2: IC16.9 J3.1 | length 37.4
  Top w0.3: v1(16.133,84.23) IC16.9@17.67,84.23
  L3 w0.226: J3.1@4.5,52.75 4.5,55.198 cw(c7.04,55.198) 5.244,56.994 10.395,62.145 ccw(c8.599,63.941) 11.139,63.941 11.139,75.297 cw(c13.679,75.297) 11.883,77.093 15.39,80.6 ccw(c13.593,82.396) 16.133,82.396 v1(16.133,84.23)
RF_CLK_N: C49.2 IC17.3 R75.1 | length 3.3
  Top w0.172: C49.2@31.18,78.507 31.403,78.283 cw(c31.403,78.221) 31.447,78.265 cw(c31.247,78.065) 31.53,78.065 31.53,75.767 ccw(c31.814,75.483) 31.412,75.483 IC17.3@31.412,75.34
RF_CLK_P: C47.2 IC17.2 R75.2 | length 3.3
  Top w0.172: 31.829,78.047 31.829,75.771 ccw(c31.924,75.771) 31.857,75.704 cw(c31.724,75.571) 31.912,75.571 IC17.2@31.912,75.34 ; 31.829,78.065 cw(c32.112,78.065) 31.912,78.265 cw(c31.956,78.221) 31.956,78.283 C47.2@32.18,78.507
RF_DIV1_OUT_N: C51.1 TR5.1 | length 2.8
  Top w0.172: TR5.1@31.153,63.418 31.153,63.863 31.746,64.456 32.175,64.456 32.276,64.557 32.276,65.058 C51.1@31.957,65.378
RF_DIV1_OUT_P: C50.1 TR5.3 | length 2.8
  Top w0.172: C50.1@32.897,65.378 32.576,65.057 32.576,64.557 32.676,64.456 33.099,64.456 33.693,63.863 TR5.3@33.693,63.418
RF_DIV1_OUTC_N: C51.2 IC17.22 R79.1 | length 4.6
  Top w0.172: IC17.22@31.412,70.44 31.412,70.201 ccw(c31.583,70.201) 31.462,70.08 cw(c31.341,69.959) 31.512,69.959 31.512,69.26 ccw(c32.301,69.26) 31.743,68.702 32.077,68.369 cw(c31.595,67.887) 32.276,67.887 32.276,66.617 31.971,66.312 ccw(c32.005,66.278) C51.2@31.957,66.278
RF_DIV1_OUTC_P: C50.2 IC17.23 R80.2 | length 4.6
  Top w0.172: IC17.23@31.912,70.44 31.912,70.201 cw(c31.741,70.201) 31.862,70.08 ccw(c31.983,69.959) 31.812,69.959 31.812,69.262 ccw(c32.307,69.262) 31.957,68.912 32.332,68.537 cw(c31.745,67.949) 32.576,67.949 32.576,66.619 32.883,66.312 cw(c32.848,66.278) C50.2@32.897,66.278
RF_DIV2_OUTR_N: IC17.18 R76.1 | length 3.6
  Top w0.172: R76.1@28.428,67.278 cw(c28.476,67.278) 28.442,67.312 28.621,67.491 cw(c28.647,67.464) 28.647,67.501 28.697,67.552 ccw(c28.576,67.674) 28.748,67.674 28.748,67.948 cw(c29.581,67.948) 28.992,68.537 29.368,68.912 ccw(c29.018,69.262) 29.512,69.262 29.512,69.959 ccw(c29.341,69.959) 29.462,70.08 cw(c29.583,70.201) 29.412,70.201 IC17.18@29.412,70.44
RF_DIV2_OUTR_P: IC17.19 R78.1 | length 3.6
  Top w0.172: R78.1@29.368,67.278 ccw(c29.319,67.278) 29.354,67.312 29.175,67.491 ccw(c29.148,67.464) 29.148,67.501 29.098,67.552 cw(c29.22,67.674) 29.047,67.674 29.047,67.886 cw(c29.731,67.886) 29.247,68.369 29.581,68.702 ccw(c29.023,69.26) 29.812,69.26 29.812,69.959 cw(c29.983,69.959) 29.862,70.08 ccw(c29.741,70.201) 29.912,70.201 IC17.19@29.912,70.44
RF_DIV5_GND: J12.2 TR5.6 | length 2
  Top w0.3: TR5.6@31.153,60.238 cw(c31.153,60.21) 31.181,60.21 J12.2@31.181,58.204